# EAGLE board mini-project (EAGLE 8.6.3)
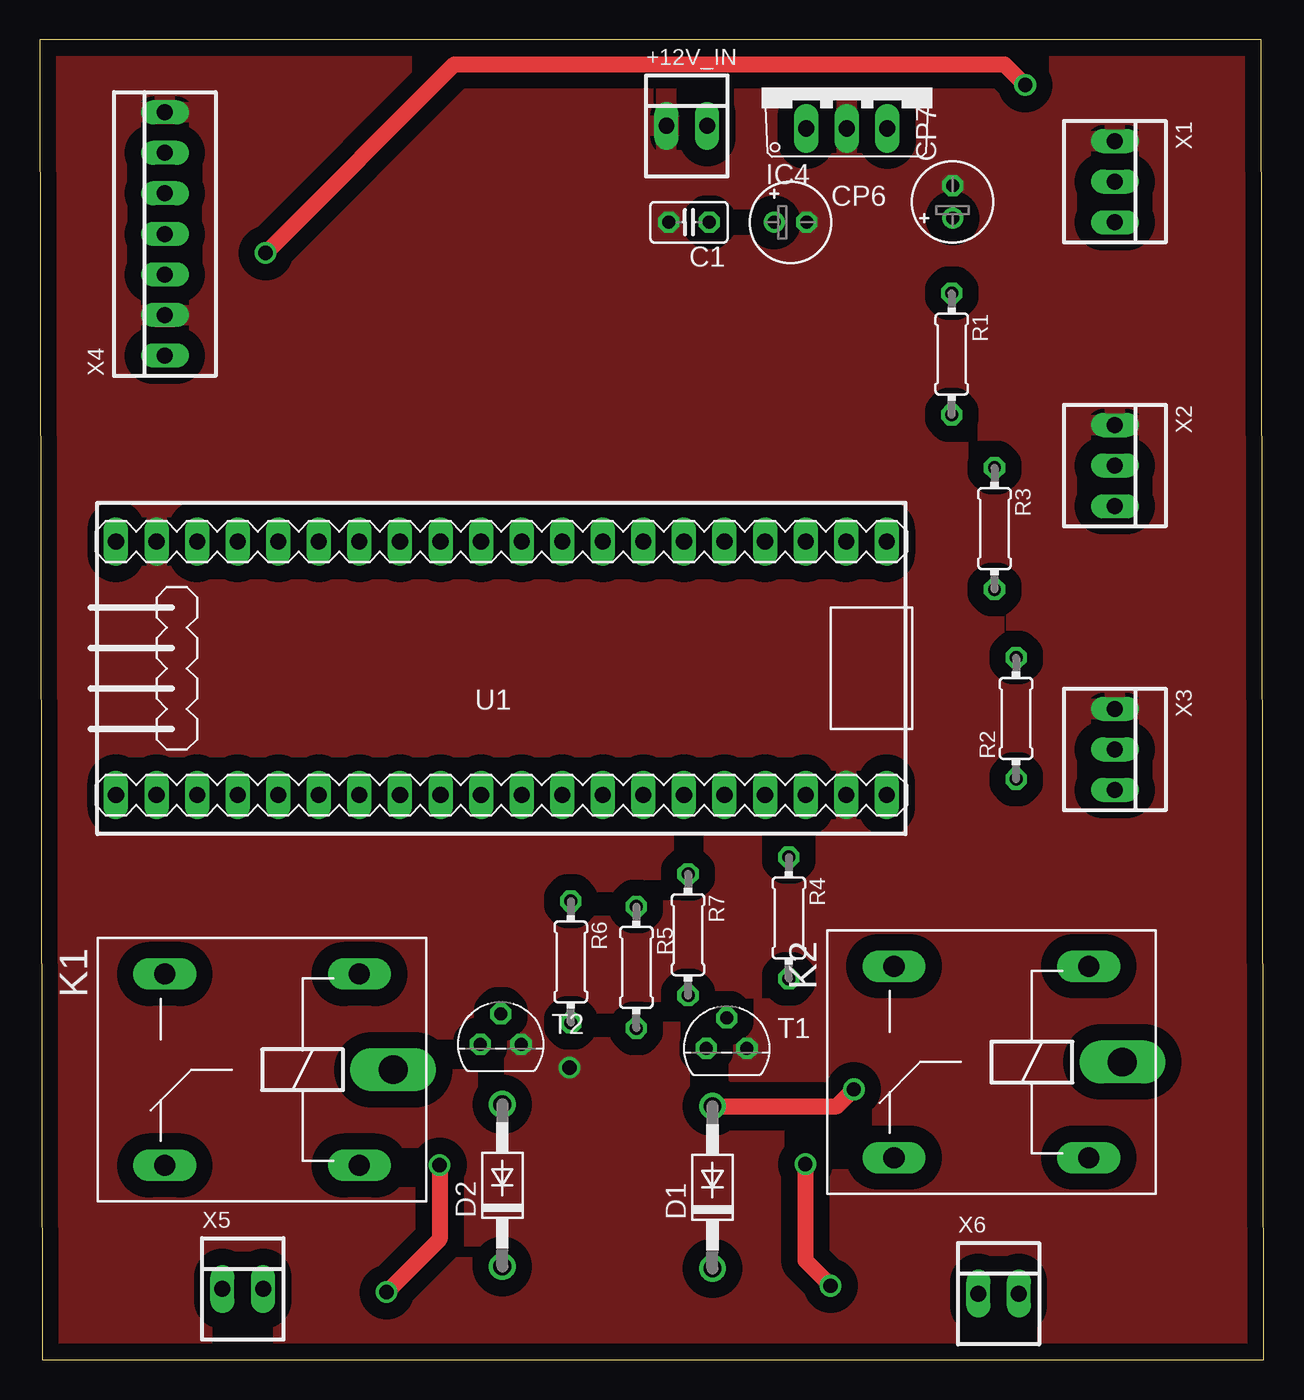
[diagram p0: board, top side]
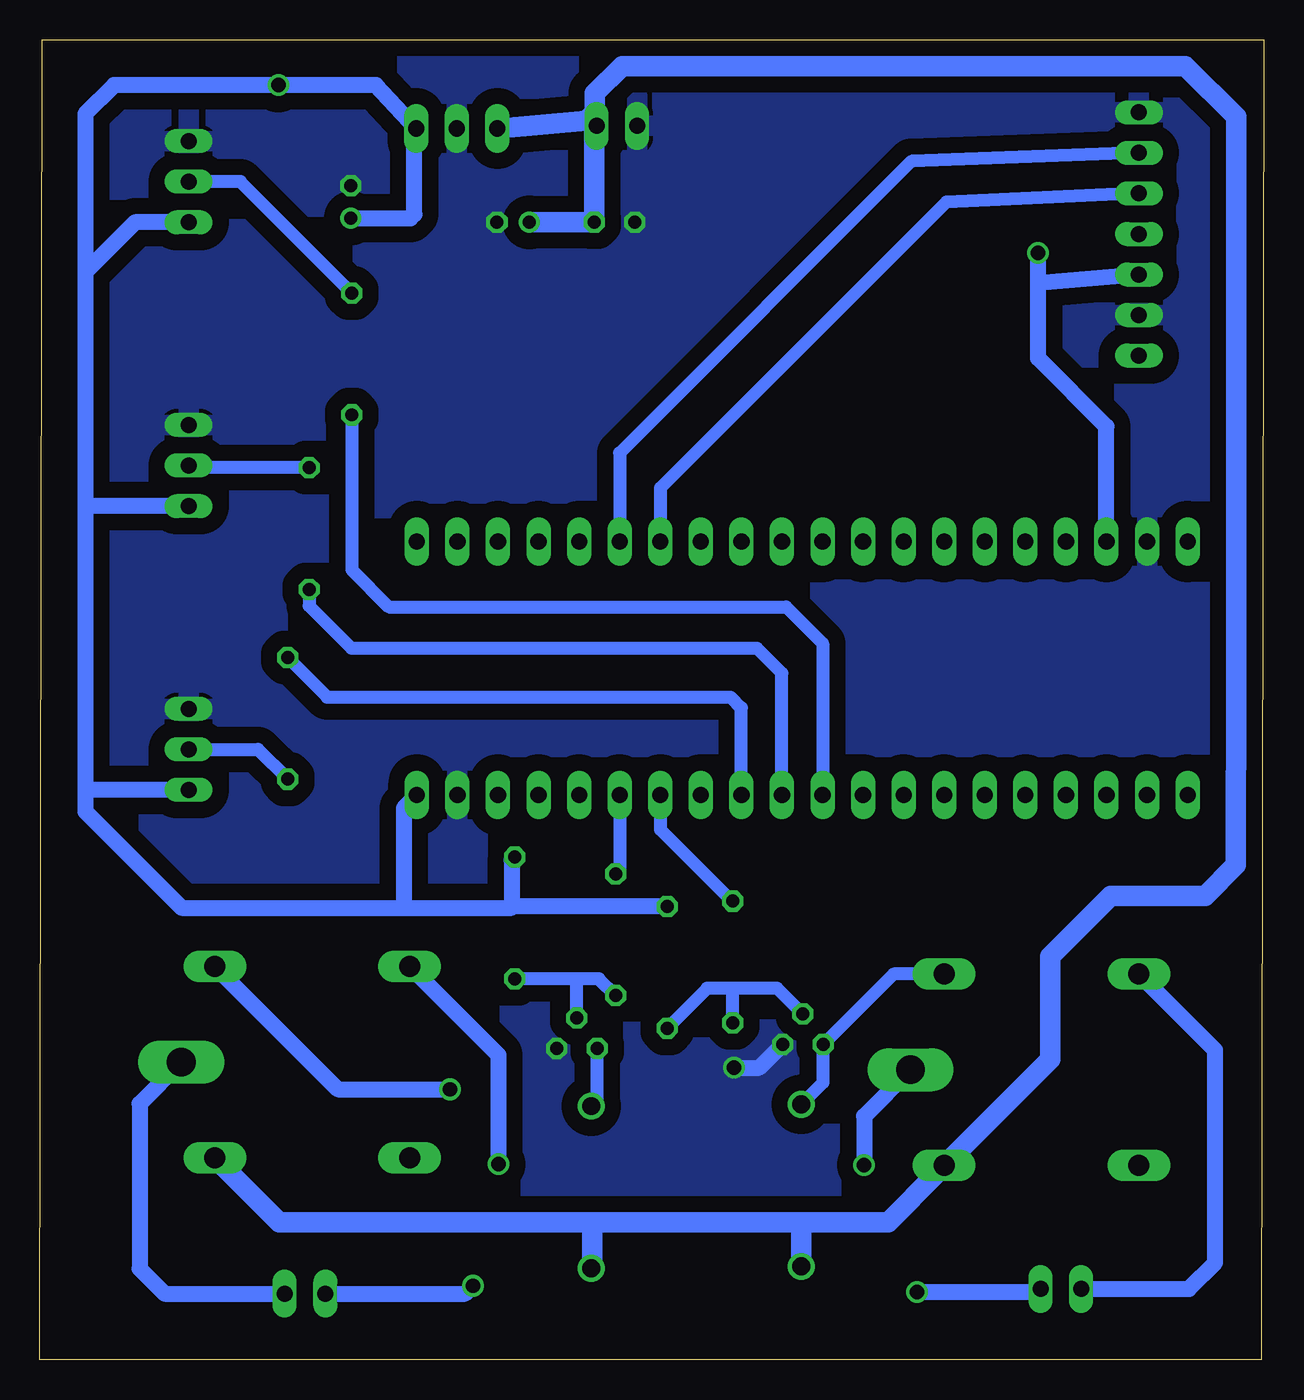
[diagram p1: board, bottom side, seen from below]

Size 76.62 x 82.66 mm. Coordinates in mm from the lower left corner, seen from the top.
Outline: 0.16,0 76.62,0 76.47,82.66 0,82.66 0.16,0
Copper layers (1*16): Top 0.035mm / dielectric 1.5mm / Bottom 0.035mm
Design rules "default": minimum track width 6mil, minimum drill 0.35mm, track to track 6mil, track to pad 6mil, pad to pad 6mil, via to via 6mil, smd to smd 6mil, copper to edge 40mil, drill to drill 6mil, minimum pad ring 10mil, minimum via ring 8mil, stop-mask expansion 4mil, vias tented up to drill 0mil, thermal gap 10mil

## Footprints (pad centres in the part's own frame; a part is rotated, then mirrored left to right if it is on the bottom)
22-23-2021 = drill 1 long: 1 -1.27,0; 2 1.27,0
C025-025X050 = drill 0.813 octagon: 1 -1.27,0; 2 1.27,0
E2-5 = drill 0.813 pad 1.27: + -1.016,0 | drill 0.813 pad 1.27 octagon: - 1.016,0
DO41-10 = drill 1.118: A 5.08,0; C -5.08,0
TO220V = drill 1.016 long: 1 -2.54,-2.54; 2 0,-2.54; 3 2.54,-2.54
ZF112 = drill 1.321 long: 1 -6.096,5.994; 2 -6.096,-5.994; O 6.096,5.994; S 6.096,-5.994 | drill 1.803 long: P -8.204,0
0204/7 = drill 0.813 octagon: 1 -3.81,0; 2 3.81,0
TO92 = drill 0.813 octagon: 1 1.27,0; 2 0,1.905; 3 -1.27,0
STM32F401(BLACK_PEARL)BRD = drill 1.016 long: 3.3 -7.938,-17.462; 3.3V 7.938,25.718; 5V 7.938,20.637; +5 -7.938,-22.543; A0 -7.938,13.018; A1 -7.938,10.477; A2 -7.938,7.938; A3 -7.938,5.397; A4 -7.938,2.857; A5 -7.938,0.318; A6 -7.938,-2.223; A7 -7.938,-4.763; A8 7.938,-12.383; A9 7.938,-9.842; A10 7.938,-7.303; A11 7.938,-4.763; A12 7.938,-2.223; A15 7.938,0.318; B0 -7.938,-7.303; B1 -7.938,-9.842; B2 -7.938,-12.383; B3 7.938,2.857; B4 7.938,5.397; B5 7.938,7.938; B6 7.938,10.477; B7 7.938,13.018; B8 7.938,15.557; B9 7.938,18.098; B10 -7.938,-14.922; B12 7.938,-22.543; B13 7.938,-20.003; B14 7.938,-17.462; B15 7.938,-14.922; C13 -7.938,23.177; C14 -7.938,20.637; C15 -7.938,18.098; G -7.938,-20.003; GND 7.938,23.177; R -7.938,15.557; VB -7.938,25.718
22-23-2031 = drill 1 long: 1 -2.54,0; 2 0,0; 3 2.54,0
22-23-2071 = drill 1 long: 1 -7.62,0; 2 -5.08,0; 3 -2.54,0; 4 0,0; 5 2.54,0; 6 5.08,0; 7 7.62,0

## Placement (x,y rotation side)
+12V_IN  22-23-2021  [22-23-2021]  40.5,77.27 0 top
C1  [C025-025X050]  40.64,71.24 180 top
CP6  100uF/25V  [E2-5]  46.99,71.24 0 top
CP7  100uF/25V  [E2-5]  57.15,72.51 90 top
D1  1N4004  [DO41-10]  42.11,10.8 90 top
D2  1N4004  [DO41-10]  28.95,10.91 90 top
IC4  7805TV  [TO220V]  50.52,79.65 0 top
K1  ZF112  [ZF112]  13.91,18.16 180 top
K2  ZF112  [ZF112]  59.57,18.63 180 top
R1  [0204/7]  57.09,62.98 270 top
R2  [0204/7]  61.12,40.16 90 top
R3  [0204/7]  59.77,52.05 270 top
R4  [0204/7]  46.89,27.66 270 top
R5  [0204/7]  37.35,24.57 270 top
R6  [0204/7]  33.24,24.9 270 top
R7  [0204/7]  40.58,26.61 270 top
T1  BC337  [TO92]  43,19.49 0 top
T2  BC337  [TO92]  28.85,19.74 0 top
U1  MCU-STM32F401(BLACK_PEARL)BRD  [STM32F401(BLACK_PEARL)BRD]  30.48,43.3 90 top
X1  22-23-2031  [22-23-2031]  67.31,73.78 270 top
X2  22-23-2031  [22-23-2031]  67.31,56 270 top
X3  22-23-2031  [22-23-2031]  67.31,38.22 270 top
X4  22-23-2071  [22-23-2071]  7.82,70.5 90 top
X5  22-23-2021  [22-23-2021]  12.7,4.43 0 top
X6  22-23-2021  [22-23-2021]  60.03,4.13 0 top

## Library data of the parts
+12V_IN X5 X6 = con-molex; MF: MOLEX; MPN: 22-23-2021; OC_FARNELL: 1462926; OC_NEWARK: 25C3832
C1 CP6 CP7 = rcl; SPICEPREFIX: C
D1 D2 = diode
IC4 = linear
K1 K2 = relay; OC_FARNELL: unknown; OC_NEWARK: unknown
R1-R7 = rcl; SPICEPREFIX: R
T1 T2 = transistor
U1 = MCU-STM32F401(BLACK_PEARL); AVAILABILITY: In Stock; DESCRIPTION: ARM® Cortex®-M4 series Microcontroller IC 32-Bit Single-Core 168MHz 512KB (512K x 8) FLASH 100-LQFP (14x14); MF: STMicroelectronics; MP: STM32F407VET6; PACKAGE: LQFP-100 STMicroelectronics; PRICE: None; PURCHASE-URL: https://pricing.snapeda.com/search/part/STM32F407VET6/?ref=eda
X1-X3 = con-molex; MF: MOLEX; MPN: 22-23-2031; OC_FARNELL: 1462950; OC_NEWARK: 30C0862
X4 = con-molex; MF: MOLEX; MPN: 22-23-2071; OC_FARNELL: 1654534; OC_NEWARK: 56H0445

## Nets
+5V: CP7.+ IC4.3 R4.1 R5.1 U1.5V U1.+5 X1.3 X2.3 X3.3 X4.3
+12V: +12V_IN.2 C1.1 CP6.+ D1.C D2.C IC4.1 K1.1 K2.1
GND: +12V_IN.1 C1.2 CP6.- CP7.- IC4.2 T1.1 T2.1 U1.G U1.GND X1.1 X2.1 X3.1 X4.2 X4.7
N$1: R1.1 X1.2
N$2: R3.1 X2.2
N$3: R2.1 X3.2
N$4: R1.2 U1.A4
N$5: R3.2 U1.A5
N$6: R2.2 U1.A6
N$7: R5.2 R6.2 T2.2
N$8: D1.A K2.2 T1.3
N$9: D2.A K1.2 T2.3
N$11: R4.2 R7.2 T1.2
N$12: K1.S X5.1
N$13: K1.P X5.2
N$14: K2.S X6.1
N$15: K2.P X6.2
N$16: R6.1 U1.B0
N$17: R7.1 U1.B1
RX: U1.A9 X4.6
TX: U1.A10 X4.5

## Tracks (layer width: path | path; a pad name or v marks a point on that pad's centre or on a via)
+5V  (via drill 0.9)
  Top 1.016: v14.13,69.31 25.95,81.14 60.39,81.14 v61.69,79.83
  Bottom 1.016: X1.3 70.66,71.24 73.78,68.12 | 73.78,68.12 73.78,53.56 | 73.78,53.56 73.78,35.68 | 73.78,35.68 73.78,34.33 67.75,28.3 53.84,28.3 | X2.3 73.68,53.46 73.78,53.56 | X3.3 73.78,35.68 | 73.78,68.12 73.78,78.03 71.97,79.83 v61.69,79.83 55.58,79.83 IC4.3 53.18,77.43 53.18,71.74 53.42,71.49 CP7.+ | U1.5V 9.84,58.44 14.13,62.73 14.13,67.37 | 14.13,67.37 v14.13,69.31 | X4.3 14.07,67.43 14.13,67.37 | 53.84,28.3 47.09,28.3 | R4.1 47.09,31.27 47.09,28.3 | U1.+5 53.84,34.55 53.84,28.3 | R5.1 47.01,28.38 47.09,28.3
+12V
  Bottom 1.27: +12V_IN.2 41.91,78.11 | 41.91,78.11 41.91,76.86 | 41.91,76.86 C1.1 CP6.+ | IC4.1 42.43,77.59 41.91,78.11 | 41.91,76.86 41.87,76.89 41.87,79.32 40.18,81.01 4.9,81.01 1.73,77.83 1.73,42.86 1.75,30.97 3.67,29.05 9.56,29.05 13.36,25.26 13.36,18.81 K1.1 20.44,11.73 20.44,11.69 23.52,8.61 28.85,8.61 | K2.1 61.64,8.61 42.03,8.61 | 42.03,8.61 28.85,8.61 | D2.C 28.95,8.51 28.85,8.61 | D1.C 42.03,5.79 42.03,8.61
GND  (via drill 0.9)
  Bottom 1.016: v33.16,18.28 31.59,18.28 T2.1
  pour Top (isolate 1.016): -1.27,82.67 76.2,82.67 76.2,0.12 -1.27,0.12
  pour Bottom (isolate 1.016): -1.27,82.67 76.2,82.67 76.2,0.12 -1.27,0.12
N$1
  Bottom 0.813: R1.1 64.08,73.78 X1.2
N$2
  Bottom 0.813: R3.1 67.17,55.86 X2.2
N$3
  Bottom 0.813: X3.2 62.98,38.22 R2.1
N$4
  Bottom 0.813: U1.A4 27.62,44.87 29.91,47.15 54.77,47.15 57.09,49.47 R1.2
N$5
  Bottom 0.813: U1.A5 30.16,43 31.73,44.57 57.13,44.57 59.77,47.21 R3.2
N$6
  Bottom 0.813: U1.A6 32.7,40.82 33.38,41.49 58.64,41.49 R2.2
N$7
  Bottom 0.813: T2.2 30.46,23.26 33.42,23.26 | 33.42,23.26 34.85,23.26 R5.2 | R6.2 33.24,23.08 33.42,23.26
N$8  (via drill 0.9)
  Top 1.016: D1.A 49.91,15.88 v50.96,16.93
  Bottom 0.813: D1.A 41.73,16.25 T1.3
  Bottom 1.016: K2.2 57.97,16.93 v50.96,16.93
N$9
  Bottom 0.813: K1.2 23.18,24.15 T2.3 27.58,17.36 D2.A
N$11
  Bottom 0.813: R7.2 41.63,23.85 43,23.85 | 43,23.85 R4.2 | T1.2 43,23.85
N$12
  Bottom 1.016: K1.S 3.04,19.37 3.04,6.07 4.68,4.43 X5.1
N$13  (via drill 0.9)
  Top 1.016: v21.71,4.23 25.02,7.54 v25.02,12.18
  Bottom 1.016: K1.P 25.02,15.25 v25.02,12.18 | X5.2 14.17,4.23 v21.71,4.23
N$14  (via drill 0.9)
  Top 1.016: v47.92,12.24 47.92,6.21 v49.51,4.62
  Bottom 1.016: K2.S 47.92,19.08 v47.92,12.24 | X6.1 50.01,4.13 v49.51,4.62
N$15
  Bottom 1.016: K2.P 70.39,16.02 70.39,5.7 68.82,4.13 X6.2
N$16
  Bottom 0.813: U1.B0 37.78,33.2 33.3,28.71 R6.1
N$17
  Bottom 0.813: U1.B1 40.32,30.68 R7.1
RX
  Bottom 0.813: X4.6 22.07,75.05 40.32,56.79 U1.A9
TX
  Bottom 0.813: X4.5 19.86,72.51 37.78,54.59 U1.A10
(copper drawn outside any net)
  shapes: Bottom area x2, Top area x2